# Altium PCB AtlasMCU_STM32_PCB.PcbDoc (part 2 of 2)
Units mm, origin at the board's own origin, x right, y up, seen from the top; angles counter-clockwise.
Board outline 53.5 x 39.5 mm, 4 copper layers (Top Layer, Int1 (GND), Int2 (PWR), Bottom Layer), stack 1.591 mm thick; 56 components, 56 nets, 263 pads, 118 vias.
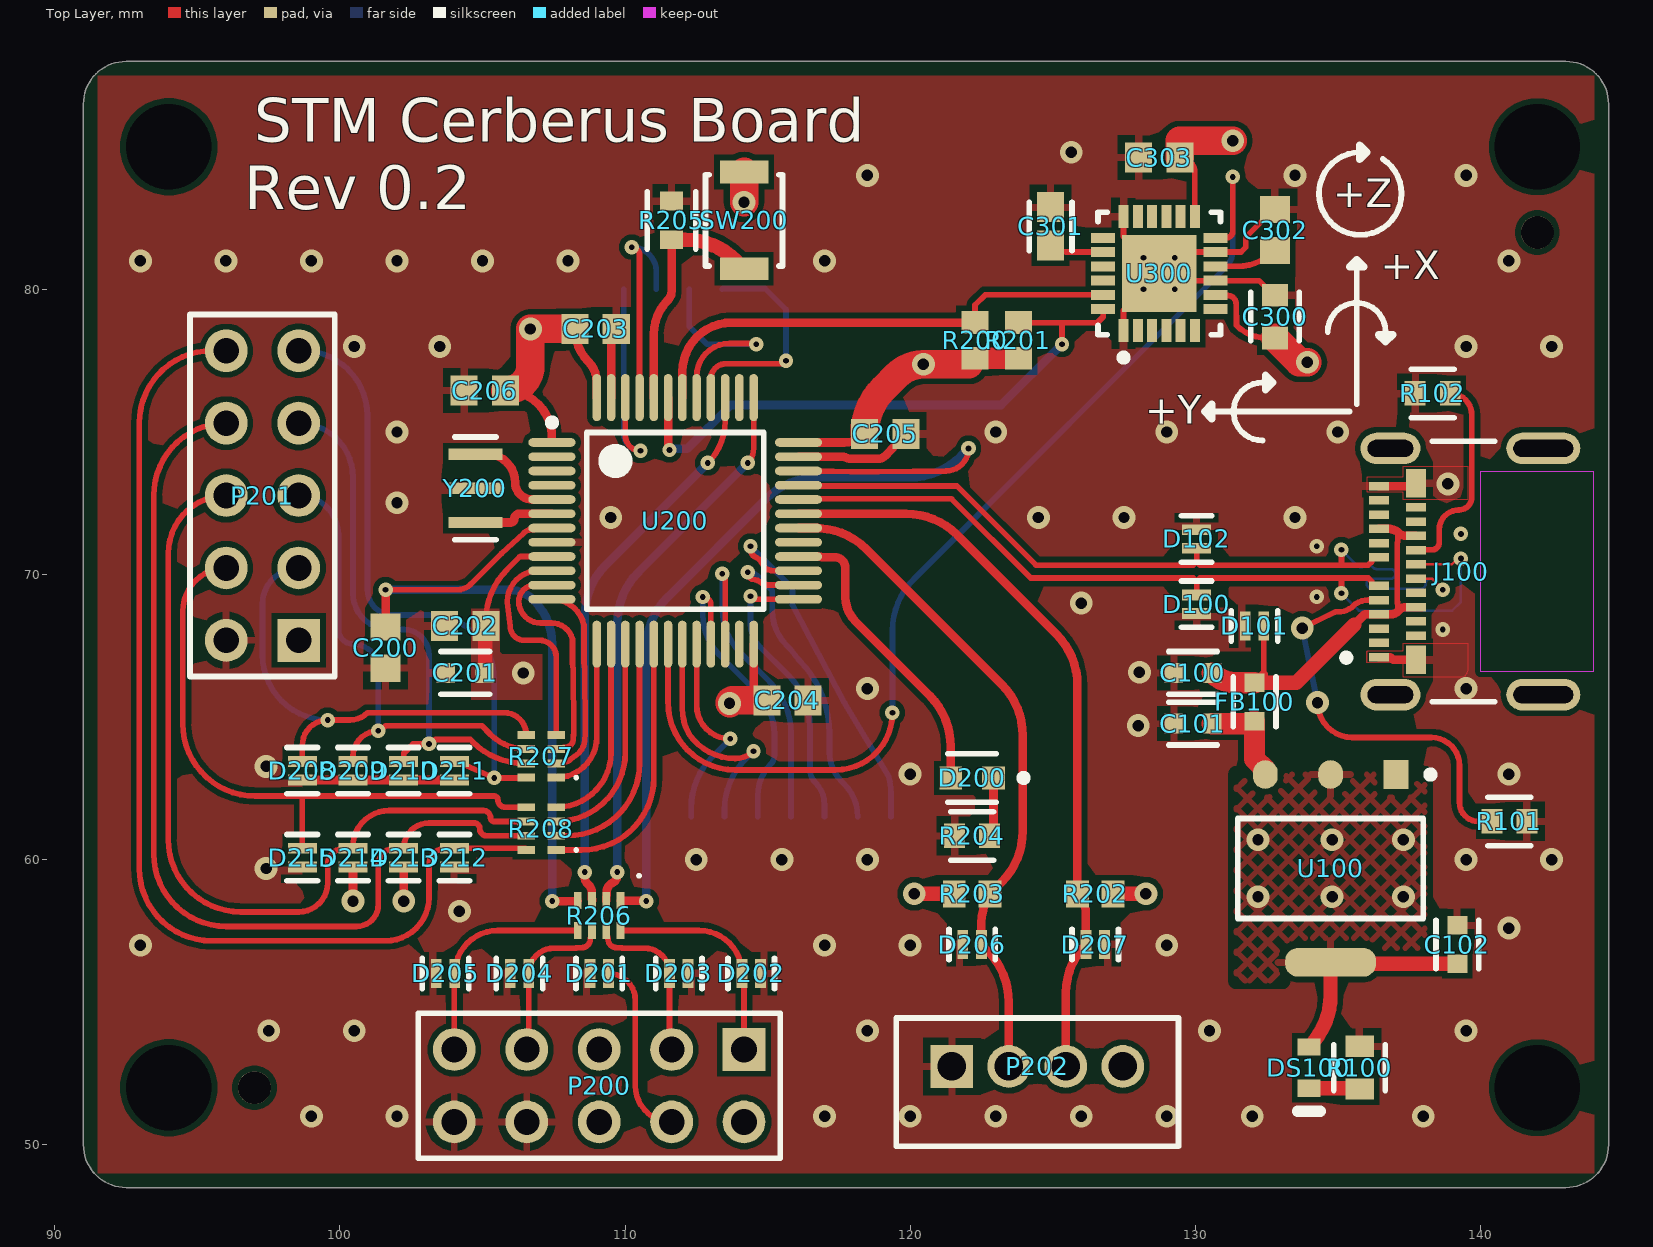
[diagram p0: Top Layer view]

## Polygon pours and split planes (outlines as drawn)
GND on Top Layer "GND_L01_P015" (solid, remove dead copper, pour order 15): 91.5,87.5 91.5,49 144,49 144,87.5
+3V3 on Top Layer "+3V3_L01_P008" (solid, remove dead copper, pour order 8): 104.6,68.8 104.6,65.6 107.1,65.6 107.1,67.2 105.7,67.2 105.6,67.3 105.6,68.8
+3V3 on Top Layer "+3V3_L01_P009" (hatched 45Degree grid 0.508 track 0.203, remove dead copper, pour order 9): 131.445,62.985 131.445,55.753 138.049,55.753 138.049,62.985
GND on Top Layer "GND_L01_P012" (solid, pour order 12): 137.287,66.929 137.287,66.421 139.446,66.421 ccw(c139.139,66.728) 139.573,66.728 139.573,67.564 137.287,67.564 137.287,67.31 136.017,67.31 136.017,66.929 136.017,67.31 136.017,66.929
GND on Top Layer "GND_L01_P010" (solid, pour order 10): 136.017,73.406 136.017,72.898 137.287,72.898 137.287,72.644 139.573,72.644 139.573,73.787 137.287,73.787 137.287,73.406
GND on Top Layer "GND_L01_P014" (solid, pour order 14): 131.953,68.834 131.953,67.31 129.667,67.31 129.667,63.881 127.254,63.881 127.254,68.834
+3V3 on Int2 (PWR) "+3V3_L03_P017" (solid, pour order 17): 91.5,87.503 91.5,48.895 144,48.895 144,87.503
GND on Int2 (PWR) "GND_L03_P013" (solid, remove dead copper, pour order 13): 144.018,75.463 144.018,64.897 132.893,64.897 132.893,75.463
GND on Int1 (GND) "GND_L02_P011" (solid, pour order 11): 91.5,87.503 91.5,48.895 144,48.895 144,87.503
GND on Bottom Layer "GND_L04_P016" (solid, remove dead copper, pour order 16): 91.5,87.5 91.5,48.9 144,48.9 144,87.5

## Silkscreen, mask and mechanical layers (free items; w line width, h text height)
Top Overlay:
  lines w0.203: 130.327,75.717 135.407,75.717 ; 132.359,74.701 cw(c132.359,75.717) 132.359,76.733 ; 134.645,78.511 cw(c135.661,78.511) 136.677,78.511 ; 135.661,75.971 135.661,81.051 ; 135.766,84.811 ccw(c135.788,83.363) 136.575,84.579
  lines w0.254: 130.327,75.717 130.581,75.463 130.581,75.971 130.327,75.717 ; 132.463,76.479 132.717,76.733 132.463,76.987 132.463,76.479 ; 135.407,80.797 135.661,81.051 135.915,80.797 135.407,80.797 ; 135.766,84.557 136.02,84.811 135.766,85.065 135.766,84.557 ; 136.423,78.408 136.677,78.154 136.931,78.408 136.423,78.408
  text "STM Cerberus Board" at 96.997,85.186 h1.52
  text "+Z" at 134.849,82.88 h1
  text "Rev 0.2" at 96.647,82.804 h1.52
  text "+X" at 136.5,80.366 h1
  text "+Y" at 128.245,75.286 h1
Bottom Overlay:
  text "Manpreet Singh" at 120.15,84.754 h1.52
  text "Jul. 2022" at 120.15,82.062 h1.52
  text "JLCJLCJLCJLC" at 140.614,49.327 h1
Mechanical 1:
  the board outline again, w0.254